# EAGLE board Pro Alarm v2 (EAGLE 9.7.0)

Size 286.79 x 252.82 mm. Coordinates in mm from the lower left corner, seen from the top.
Outline: 0,0 286.79,0 286.79,252.82 0,252.82 0,0
Copper layers (1*16): Top 0.035mm / dielectric 1.5mm / Bottom 0.035mm
Design rules "default": minimum track width 6mil, minimum drill 0.35mm, track to track 6mil, track to pad 6mil, pad to pad 6mil, via to via 6mil, smd to smd 6mil, copper to edge 40mil, drill to drill 6mil, minimum pad ring 10mil, minimum via ring 8mil, stop-mask expansion 4mil, vias tented up to drill 0mil, thermal gap 10mil

## Footprints (pad centres in the part's own frame; a part is rotated, then mirrored left to right if it is on the bottom)
LEDRD254W60D565H860B = drill 0.981 pad 1.581: 1 -1.27,0; 2 1.27,0
7SEG-13 = drill 0.813 long: 1 -5.08,-7.62; 2 -2.54,-7.62; 3 0,-7.62; 4 2.54,-7.62; 5 5.08,-7.62; 6 5.08,7.62; 7 2.54,7.62; 8 0,7.62; 9 -2.54,7.62; 10 -5.08,7.62
PIEZO = drill 1 pad 1.6: 1 -3.5,0; 2 3.5,0
28027 = drill 1.016 long: 1 -2.54,0; 2 0,0; 3 2.54,0
RESAD1016W63L850D250B = drill 0.83 pad 1.43: 1 -5.08,0; 2 5.08,0
SWITCH-MOMENTARY-PTH-6.5MM = drill 1.016 pad 1.88: 1 -3.251,2.261; 2 3.251,2.261; 3 -3.251,-2.261; 4 3.251,-2.261
ARDUINO-UNO-R3-SHIELD = drill 1.016 pad 1.88: 3.3V 24.13,-2.54; 5V 24.13,0; A0 24.13,12.7; A1 24.13,15.24; A2 24.13,17.78; A3 24.13,20.32; A4 24.13,22.86; A5 24.13,25.4; AREF -24.13,-13.97; D2 -24.13,20.32; D3 -24.13,17.78; D4 -24.13,15.24; D5 -24.13,12.7; D6 -24.13,10.16; D7 -24.13,7.62; D8 -24.13,3.81; D9 -24.13,1.27; D10 -24.13,-1.27; D11 -24.13,-3.81; D12 -24.13,-6.35; D13 -24.13,-8.89; GND@0 24.13,2.54; GND@1 24.13,5.08; GND@2 -24.13,-11.43; IOREF 24.13,-7.62; NC 24.13,-10.16; RES 24.13,-5.08; RX -24.13,25.4; SCL -24.13,-19.05; SDA -24.13,-16.51; TX -24.13,22.86; VIN 24.13,7.62
DIP762W53P254L1969H508Q16B = drill 0.743 pad 1.343: 1 -3.81,8.89; 2 -3.81,6.35; 3 -3.81,3.81; 4 -3.81,1.27; 5 -3.81,-1.27; 6 -3.81,-3.81; 7 -3.81,-6.35; 8 -3.81,-8.89; 9 3.81,-8.89; 10 3.81,-6.35; 11 3.81,-3.81; 12 3.81,-1.27; 13 3.81,1.27; 14 3.81,3.81; 15 3.81,6.35; 16 3.81,8.89
JHD-162A = drill 1.016 long: 1 -19.05,0; 2 -16.51,0; 3 -13.97,0; 4 -11.43,0; 5 -8.89,0; 6 -6.35,0; 7 -3.81,0; 8 -1.27,0; 9 1.27,0; 10 3.81,0; 11 6.35,0; 12 8.89,0; 13 11.43,0; 14 13.97,0; 15 16.51,0; 16 19.05,0
DIL16 = drill 0.813 long: 1 -8.89,-3.81; 2 -6.35,-3.81; 3 -3.81,-3.81; 4 -1.27,-3.81; 5 1.27,-3.81; 6 3.81,-3.81; 7 6.35,-3.81; 8 8.89,-3.81; 9 8.89,3.81; 10 6.35,3.81; 11 3.81,3.81; 12 1.27,3.81; 13 -1.27,3.81; 14 -3.81,3.81; 15 -6.35,3.81; 16 -8.89,3.81

## Placement (x,y rotation side)
D1  RED  [LEDRD254W60D565H860B]  173.83,155.87 180 top
DIGIT2  7SEG-CK  [7SEG-13]  108.57,25.56 0 top
PIEZO1  PIEZO  [PIEZO]  108.51,174.37 180 top
PIR1  PIR-SENSOR_28027  [28027]  6.35,165.81 90 top
PIR2  PIR-SENSOR_28027  [28027]  6.6,203.75 90 top
PIR3  PIR-SENSOR_28027  [28027]  68.88,246.23 0 top
PIR4  PIR-SENSOR_28027  [28027]  131.04,246.47 0 top
R1  1k  [RESAD1016W63L850D250B]  261.36,129.01 0 top
R2  470  [RESAD1016W63L850D250B]  111.17,9.59 270 top
R3  470  [RESAD1016W63L850D250B]  105.98,8.97 270 top
R4  470  [RESAD1016W63L850D250B]  103.34,9.09 270 top
R5  470  [RESAD1016W63L850D250B]  103.48,41.9 90 top
R6  470  [RESAD1016W63L850D250B]  105.98,41.94 90 top
R7  470  [RESAD1016W63L850D250B]  111.13,42.13 90 top
R8  470  [RESAD1016W63L850D250B]  113.6,42.13 90 top
R9  201  [RESAD1016W63L850D250B]  175.43,134.21 90 top
SBACK  SWITCH_MOMENTARY  [SWITCH-MOMENTARY-PTH-6.5MM]  150.38,176.98 90 top
SCLICK  SWITCH_MOMENTARY  [SWITCH-MOMENTARY-PTH-6.5MM]  159.67,177.03 90 top
SNEXT  SWITCH_MOMENTARY  [SWITCH-MOMENTARY-PTH-6.5MM]  170.17,177.17 90 top
U1  ARDUINO-UNO-R3-SHIELD  [ARDUINO-UNO-R3-SHIELD]  120.06,100.14 270 top
U2  CD4511_PDIP  [DIP762W53P254L1969H508Q16B]  142.39,35.48 270 top
U3  LCD-16X2JHD-162A  [JHD-162A]  231.17,124.74 0 top
U4  PCF8574DIP16  [DIL16]  75.26,161.96 270 top

## Library data of the parts
D1 = Tinkercad; CATEGORY: Opto-Electronic; SUB-CATEGORY: LED; VALUE: LED_RED
DIGIT2 = Tinkercad; CATEGORY: Opto-Electronic; SUB-CATEGORY: Display; TYPE: 7-Segment
PIEZO1 PIR1-PIR4 R1-R9 SBACK SCLICK SNEXT U1-U4 = Tinkercad

## Nets
D1_A: D1.1 R9.2
DIGIT2_A: DIGIT2.7 R7.1
DIGIT2_B: DIGIT2.6 R8.1
DIGIT2_C: DIGIT2.4 R2.1
DIGIT2_D: DIGIT2.2 R3.1
DIGIT2_E: DIGIT2.1 R4.1
DIGIT2_F: DIGIT2.9 R6.1
DIGIT2_G: DIGIT2.10 R5.1
PIR1_OUT: PIR1.1 U4.4
PIR2_OUT: PIR2.1 U4.11
PIR3_OUT: PIR3.1 U4.6
PIR4_OUT: PIR4.1 U4.10
U1_5V: PIR1.2 PIR2.2 PIR3.2 PIR4.2 R9.1 U1.5V U2.3 U2.4 U2.16 U3.2 U3.15 U4.16
U1_A0: U1.A0 U2.7
U1_A1: U1.A1 U2.1
U1_A2: U1.A2 U2.2
U1_A3: U1.A3 U2.6
U1_D3: D1.2 U1.D3
U1_D4: SBACK.2 U1.D4
U1_D5: SCLICK.2 U1.D5
U1_D6: SNEXT.2 U1.D6
U1_D7: U1.D7 U3.11
U1_D8: U1.D8 U3.12
U1_D9: U1.D9 U3.13
U1_D10: U1.D10 U3.14
U1_D11: U1.D11 U3.4
U1_D12: U1.D12 U3.6
U1_D13: PIEZO1.1 U1.D13
U1_GND: DIGIT2.8 PIEZO1.2 PIR1.3 PIR2.3 PIR3.3 PIR4.3 R1.2 SBACK.3 SCLICK.3 SNEXT.3 U1.GND@0 U1.GND@1 U1.GND@2 U2.5 U2.8 U3.1 U3.3 U3.5 U4.8
U1_SCL: U1.SCL U4.14
U1_SDA: U1.SDA U4.15
U2_A: R7.2 U2.13
U2_B: R8.2 U2.12
U2_C: R2.2 U2.11
U2_D: R3.2 U2.10
U2_E: R4.2 U2.9
U2_F: R6.2 U2.15
U2_G: R5.2 U2.14
U3_LED-: R1.1 U3.16

## Tracks (layer width: path | path; a pad name or v marks a point on that pad's centre or on a via)
D1_A  (1 unrouted)
DIGIT2_A  (1 unrouted)
DIGIT2_B  (1 unrouted)
DIGIT2_C  (1 unrouted)
DIGIT2_D  (1 unrouted)
DIGIT2_E  (1 unrouted)
DIGIT2_F  (1 unrouted)
DIGIT2_G  (1 unrouted)
PIR1_OUT  (1 unrouted)
PIR2_OUT  (1 unrouted)
PIR3_OUT  (1 unrouted)
PIR4_OUT  (1 unrouted)
U1_5V  (11 unrouted)
U1_A0  (1 unrouted)
U1_A1  (1 unrouted)
U1_A2  (1 unrouted)
U1_A3  (1 unrouted)
U1_D3  (1 unrouted)
U1_D4  (1 unrouted)
U1_D5  (1 unrouted)
U1_D6  (1 unrouted)
U1_D7  (1 unrouted)
U1_D8  (1 unrouted)
U1_D9  (1 unrouted)
U1_D10  (1 unrouted)
U1_D11  (1 unrouted)
U1_D12  (1 unrouted)
U1_D13  (1 unrouted)
U1_GND  (18 unrouted)
U1_SCL  (1 unrouted)
U1_SDA  (1 unrouted)
U2_A  (1 unrouted)
U2_B  (1 unrouted)
U2_C  (1 unrouted)
U2_D  (1 unrouted)
U2_E  (1 unrouted)
U2_F  (1 unrouted)
U2_G  (1 unrouted)
U3_LED-  (1 unrouted)